# EAGLE board bitfury_adapter (EAGLE 6.4)
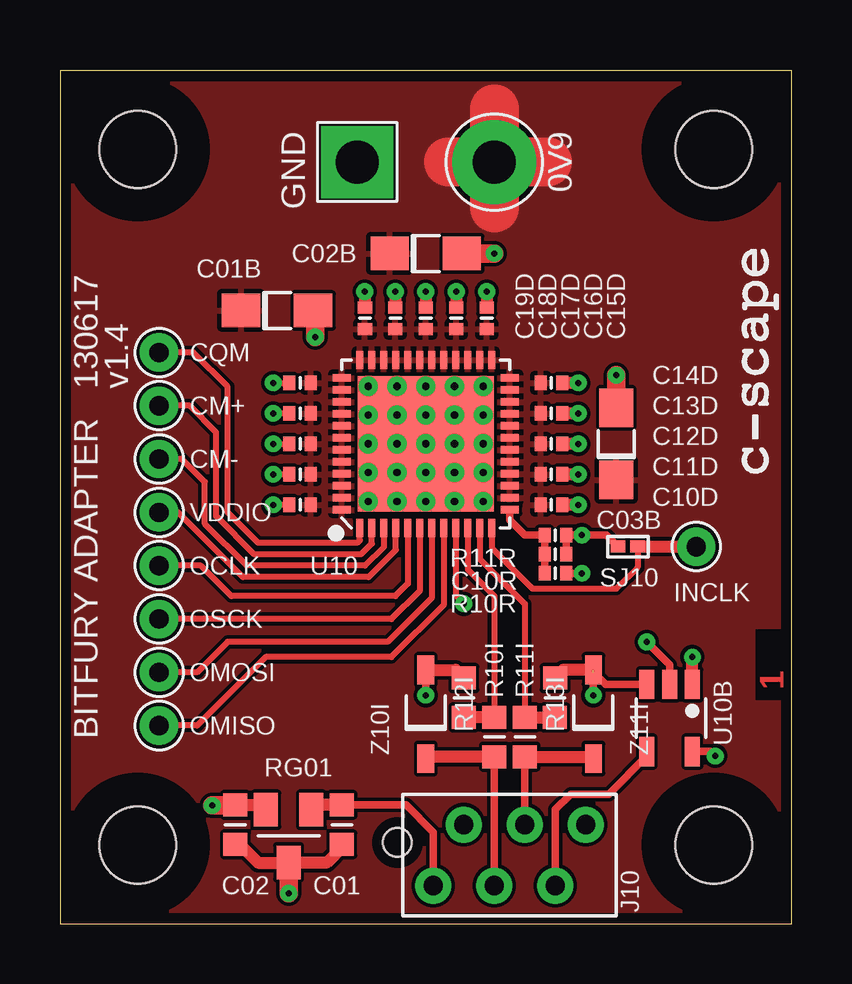
[diagram p0: board, top side]
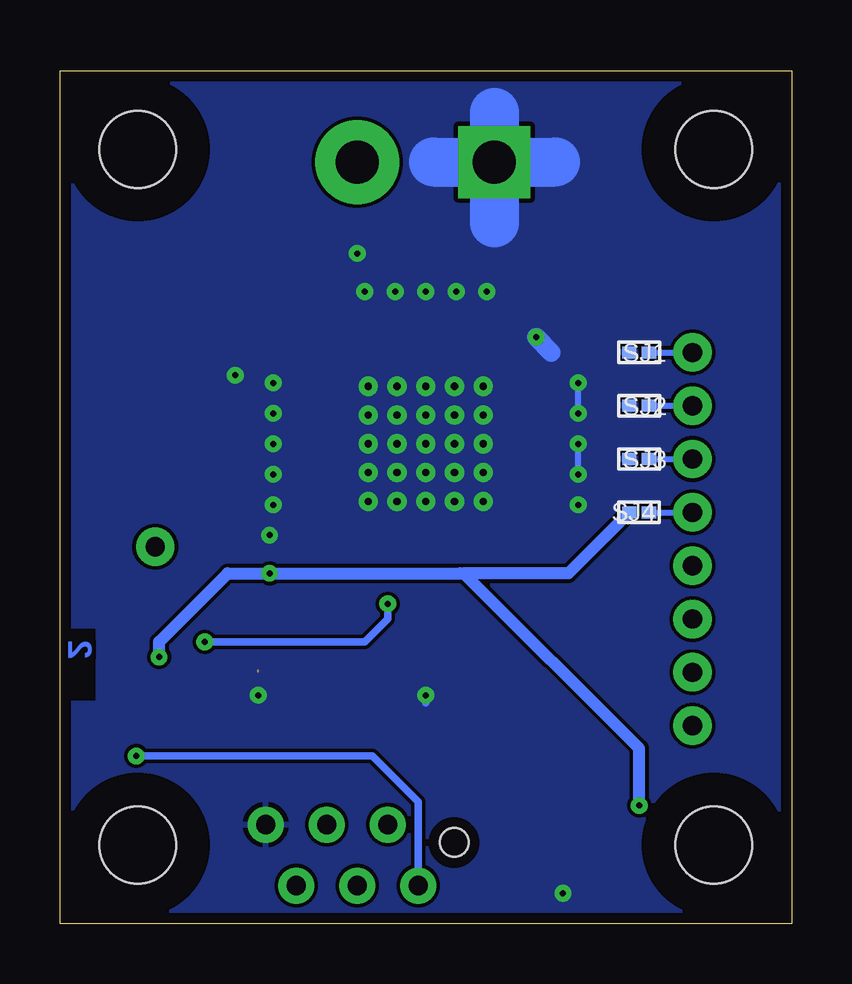
[diagram p1: board, bottom side, seen from below]

Size 30.48 x 35.56 mm. Coordinates in mm from the lower left corner, seen from the top.
Outline: 0,0 30.48,0 30.48,35.56 0,35.56 0,0
Copper layers (1*16): Top 0.018mm / dielectric 1.55mm / Bottom 0.018mm
Design rules "default *": minimum track width 0.15mm, minimum drill 0.25mm, track to track 0.15mm, track to pad 0.15mm, pad to pad 0.15mm, via to via 0.15mm, smd to smd 0mil, copper to edge 0.45mm, drill to drill 0.3mm, minimum pad ring 0.2mm, minimum via ring 0.2mm, stop-mask expansion 0.1mm, vias tented up to drill 0.4mm, thermal gap 0.2mm

## Footprints (pad centres in the part's own frame; a part is rotated, then mirrored left to right if it is on the bottom)
PAD_HOLE_BIG = drill 1.8 pad 3.5: 1 0,0
CAP0603 = smd 0.95 x 1: 1 -0.821,0.002; 2 0.822,0
CAP0402 = smd 0.5 x 0.6: 1 -0.45,0; 2 0.45,0
ECAP_SMA = smd 1.6 x 1.4: + -1.5,0; - 1.5,0
PAD_HOLE_0.8MM = drill 0.8 pad 1.6: 1 0,0
HOLE_NPTH_3.2MM = hole 3.2: 0,0
CON_MICROMATCH_TOP_6F = drill 0.8 pad 1.5: 1 -3.175,-1.27; 2 -1.905,1.27; 3 -0.635,-1.27; 4 0.635,1.27; 5 1.905,-1.27; 6 3.175,1.27 | hole 1.2: -4.675,0.53
RES0603 = smd 0.95 x 1: 1 -0.821,0.002; 2 0.822,0
RES0402 = smd 0.5 x 0.6: 1 -0.45,0; 2 0.45,0
SOT23 = smd 1 x 1.4: 1 -0.95,-1.1; 2 0.95,-1.1; 3 0,1.1
SJ2-S = smd 0.6 x 0.5: 1 -0.41,0; 2 0.41,0
QNF48 = smd 0.3 x 0.75: 1 -2.75,-3.5; 2 -2.25,-3.5; 3 -1.75,-3.5; 4 -1.25,-3.5; 5 -0.75,-3.5; 6 -0.25,-3.5; 7 0.25,-3.5; 8 0.75,-3.5; 9 1.25,-3.5; 10 1.75,-3.5; 11 2.25,-3.5; 12 2.75,-3.5; 25 2.75,3.5; 26 2.25,3.5; 27 1.75,3.5; 28 1.25,3.5; 29 0.75,3.5; 30 0.25,3.5; 31 -0.25,3.5; 32 -0.75,3.5; 33 -1.25,3.5; 34 -1.75,3.5; 35 -2.25,3.5; 36 -2.75,3.5 | smd 0.75 x 0.3: 13 3.5,-2.75; 14 3.5,-2.25; 15 3.5,-1.75; 16 3.5,-1.25; 17 3.5,-0.75; 18 3.5,-0.25; 19 3.5,0.25; 20 3.5,0.75; 21 3.5,1.25; 22 3.5,1.75; 23 3.5,2.25; 24 3.5,2.75; 37 -3.5,2.75; 38 -3.5,2.25; 39 -3.5,1.75; 40 -3.5,1.25; 41 -3.5,0.75; 42 -3.5,0.25; 43 -3.5,-0.25; 44 -3.5,-0.75; 45 -3.5,-1.25; 46 -3.5,-1.75; 47 -3.5,-2.25; 48 -3.5,-2.75 | smd 5.65 x 5.65: EP 0,0 | drill 0.3 pad 0.8: V1 -2.4,2.4; V2 -1.2,2.4; V3 0,2.4; V4 1.2,2.4; V5 2.4,2.4; V6 -2.4,1.2; V7 -1.2,1.2; V8 0,1.2; V9 1.2,1.2; V10 2.4,1.2; V11 -2.4,0; V12 -1.2,0; V13 0,0; V14 1.2,0; V15 2.4,0; V16 -2.4,-1.2; V17 -1.2,-1.2; V18 0,-1.2; V19 1.2,-1.2; V20 2.4,-1.2; V21 -2.4,-2.4; V22 -1.2,-2.4; V23 0,-2.4; V24 1.2,-2.4; V25 2.4,-2.4
SOT23-5 = smd 0.62 x 1.22: 1 -0.95,-1.4; 2 0,-1.4; 3 0.95,-1.4; 4 0.95,1.4; 5 -0.95,1.4
PAD_HOLE_SQR_1.8MM = drill 1.8 pad 3 square: 1 0,0
ZENER_SOD123 = smd 1.2 x 0.7: 1 -1.85,0; 2 1.85,0

## Placement (x,y rotation side)
0V9  PIN_TEST_BIG  [PAD_HOLE_BIG]  18.1,31.75 0 top
C01  1U  [CAP0603]  11.75,4.13 270 top
C1AD  100N  [CAP0402]  10,22.54 180 top
C01B  22U  [ECAP_SMA]  9.05,25.56 0 top
C1BD  100N  [CAP0402]  10,21.27 180 top
C1CD  100N  [CAP0402]  10,20 180 top
C1DD  100N  [CAP0402]  10,18.73 180 top
C1ED  100N  [CAP0402]  10,17.46 180 top
C02  10U  [CAP0603]  7.3,4.13 270 top
C02B  22U  [ECAP_SMA]  15.24,27.94 0 top
C03B  22U  [ECAP_SMA]  23.18,20 90 top
C10D  100N  [CAP0402]  20.48,17.46 0 top
C10R  100N  [CAP0402]  20.64,15.4 0 top
C11D  100N  [CAP0402]  20.48,18.73 0 top
C12D  100N  [CAP0402]  20.48,20 0 top
C13D  100N  [CAP0402]  20.48,21.27 0 top
C14D  100N  [CAP0402]  20.48,22.54 0 top
C15D  100N  [CAP0402]  17.78,25.24 90 top
C16D  100N  [CAP0402]  16.51,25.24 90 top
C17D  100N  [CAP0402]  15.24,25.24 90 top
C18D  100N  [CAP0402]  13.97,25.24 90 top
C19D  100N  [CAP0402]  12.7,25.24 90 top
CM+  PIN_TEST  [PAD_HOLE_0.8MM]  4.13,21.59 0 top
CM-  PIN_TEST  [PAD_HOLE_0.8MM]  4.13,19.37 0 top
CQM  PIN_TEST  [PAD_HOLE_0.8MM]  4.13,23.81 0 top
H1  HOLE_NPTH_3.2MM  [HOLE_NPTH_3.2MM]  3.24,32.28 0 top
H2  HOLE_NPTH_3.2MM  [HOLE_NPTH_3.2MM]  27.24,32.28 0 top
H3  HOLE_NPTH_3.2MM  [HOLE_NPTH_3.2MM]  27.24,3.28 0 top
H4  HOLE_NPTH_3.2MM  [HOLE_NPTH_3.2MM]  3.24,3.28 0 top
INCLK  PIN_TEST  [PAD_HOLE_0.8MM]  26.51,15.72 90 top
J10  [CON_MICROMATCH_TOP_6F]  18.73,2.86 0 top
OCLK  PIN_TEST  [PAD_HOLE_0.8MM]  4.13,14.92 0 top
OMISO  PIN_TEST  [PAD_HOLE_0.8MM]  4.13,8.26 0 top
OMOSI  PIN_TEST  [PAD_HOLE_0.8MM]  4.13,10.48 0 top
OSCK  PIN_TEST  [PAD_HOLE_0.8MM]  4.13,12.7 0 top
R10I  330R  [RES0603]  18.1,7.78 90 top
R10R  1K  [RES0402]  20.64,14.61 180 top
R11I  330R  [RES0603]  19.37,7.78 90 top
R11R  1K  [RES0402]  20.64,16.19 0 top
R12I  390R  [RES0603]  16.83,9.42 270 top
R13I  390R  [RES0603]  20.62,9.42 270 top
RG01  AP130-18SAG-7  [SOT23]  9.53,3.65 180 top
SJ1  SJ2SJ2-S  [SJ2-S]  6.35,23.81 0 bottom
SJ2  SJ2SJ2-S  [SJ2-S]  6.35,21.59 0 bottom
SJ3  SJ2SJ2-S  [SJ2-S]  6.35,19.37 0 bottom
SJ4  SJ2SJ2-S  [SJ2-S]  6.35,17.14 180 bottom
SJ10  SJ2SJ2-S  [SJ2-S]  23.65,15.72 0 top
U10  BITFURY  [QNF48]  15.24,20 0 top
U10B  FXLP34P5X  [SOT23-5]  25.4,8.57 180 top
U$47  [CSCAPE2]  29.53,18.73 90 top
U$83  [PAD_HOLE_SQR_1.8MM]  12.38,31.75 270 top
VDDIO  PIN_TEST  [PAD_HOLE_0.8MM]  4.13,17.14 0 top
Z10I  3V3  [ZENER_SOD123]  15.24,8.73 270 top
Z11I  3V3  [ZENER_SOD123]  22.23,8.73 270 top

## Library data of the parts
0V9 C01 C1AD C01B C1BD C1CD C1DD C1ED C02 C02B C03B C10D C10R C11D C12D C13D C14D C15D C16D C17D C18D C19D CM+ CM- CQM H1-H4 INCLK J10 OCLK OMISO OMOSI OSCK R10I R10R R11I R11R R12I R13I SJ1-SJ4 SJ10 U$83 VDDIO Z10I Z11I = 00-own_parts
RG01 U10 U10B = 00-bitfury
U$47 = 01-cs-logo

## Nets
GND: C01.2 C1AD.2 C01B.- C1BD.2 C1CD.2 C1DD.2 C1ED.2 C02.2 C02B.- C03B.- C10D.2 C10R.2 C11D.2 C12D.2 C13D.2 C14D.2 C15D.2 C16D.2 C17D.2 C18D.2 C19D.2 J10.6 R11R.2 R12I.1 R13I.1 RG01.3 SJ1.1 SJ2.1 SJ3.1 SJ10.1 U10.EP U10.V1 U10.V2 U10.V3 U10.V4 U10.V5 U10.V6 U10.V7 U10.V8 U10.V9 U10.V10 U10.V11 U10.V12 U10.V13 U10.V14 U10.V15 U10.V16 U10.V17 U10.V18 U10.V19 U10.V20 U10.V21 U10.V22 U10.V23 U10.V24 U10.V25 U10B.3 U$83.1 Z10I.1 Z11I.1
INCLK: INCLK.1 SJ10.2 U10.12
INMISO: U10.9 U10B.2
INMISOB: J10.5 U10B.4
INMOSI: R10I.2 R12I.2 U10.10
INSCK: R11I.2 R13I.2 U10.11
IOREF: C10R.1 R10R.2 R11R.1 U10.13
N$1: J10.3 R10I.1 Z10I.2
N$2: J10.4 R11I.1 Z11I.2
N$5: CM-.1 SJ3.2 U10.3
N$6: CM+.1 SJ2.2 U10.2
N$7: CQM.1 SJ1.2 U10.1
N$8: SJ4.1 U10.4 VDDIO.1
OUTCLK: OCLK.1 U10.5
OUTMISO: OMISO.1 U10.8
OUTMOSI: OMOSI.1 U10.7
OUTSCK: OSCK.1 U10.6
VDD_0V9: 0V9.1 C1AD.1 C01B.+ C1BD.1 C1CD.1 C1DD.1 C1ED.1 C02B.+ C03B.+ C10D.1 C11D.1 C12D.1 C13D.1 C14D.1 C15D.1 C16D.1 C17D.1 C18D.1 C19D.1 U10.14 U10.15 U10.16 U10.17 U10.18 U10.19 U10.20 U10.21 U10.22 U10.23 U10.24 U10.25 U10.26 U10.27 U10.28 U10.29 U10.30 U10.31 U10.32 U10.33 U10.34 U10.35 U10.36 U10.37 U10.38 U10.39 U10.40 U10.41 U10.42 U10.43 U10.44 U10.45 U10.46 U10.47 U10.48
VDD_1V8: C02.1 R10R.1 RG01.2 SJ4.2 U10B.1
VDD_3V3: C01.1 J10.1 RG01.1 U10B.5

## Tracks (layer width: path | path; a pad name or v marks a point on that pad's centre or on a via)
GND  (via drill 0.25 pad 0.7)  (1 unrouted)
  Top 0.203: 13.49,17.62 13.34,17.78
  Top 0.254: C1DD.2 v8.89,18.73 | v8.89,20 C1CD.2 | C1BD.2 v8.89,21.27 | v8.89,22.54 C1AD.2 | C1ED.2 v8.89,17.46 | U10.V21 13.02,17.78 13.34,17.78
  Top 0.305: SJ10.1 22.77,16.19 v21.75,16.19 R11R.2 C10R.2 | Z10I.1 v15.24,9.53 | U10B.3 22.73,9.97 22.23,10.48 v22.23,9.53
  Top 0.508: v12.7,26.35 C19D.2 | v13.97,26.35 C18D.2 | v15.24,26.35 C17D.2 | v16.51,26.35 C16D.2 | v17.78,26.35 C15D.2 | v21.59,22.54 C14D.2 | v21.59,21.27 C13D.2 | v21.59,20 C12D.2 | v21.59,18.73 C11D.2 | v21.59,17.46 C10D.2 | C01.2 11.75,3.17 11.11,2.54 RG01.3 9.51,2.54 8.26,2.54 7.49,3.31 C02.2 | Z10I.1 16.49,10.58 R12I.1 | Z11I.1 20.97,10.58 R13I.1
  Top 0.762: v9.53,1.27 RG01.3 | v23.18,22.86 C03B.- | v18.1,27.94 C02B.- | C01B.- 10.64,25.47 v10.64,24.45
  Bottom 0.254: v8.89,18.73 v8.89,20 | v8.89,21.27 v8.89,22.54
  Bottom 0.305: v15.24,9.53 15.24,9.21
  Bottom 0.762: v10.64,24.45 10,23.81
  Bottom 2.032: U$83.1 9.84,31.75 | 14.92,31.75 U$83.1 | 12.38,33.81 U$83.1 | U$83.1 12.38,29.21
  pour Bottom: 0,0 30.48,0 30.48,9.21 28.89,9.21 28.89,12.38 30.48,12.38 30.48,35.56 0,35.56
INCLK
  Top 0.254: U10.12 17.99,15.66 19.68,13.97 23.18,13.97 24.06,14.86 SJ10.2
  Top 0.508: SJ10.2 INCLK.1
INMISO  (via drill 0.25 pad 0.7)
  Top 0.254: U10.9 16.49,13.67 v16.83,13.34
  Top 0.305: U10B.2 25.4,10.79 v24.45,11.75
  Bottom 0.305: v16.83,13.34 16.83,12.7 17.78,11.75 v24.45,11.75
INMISOB
  Top 0.305: U10B.4 24.45,6.99 22.86,5.4 21.27,5.4 20.64,4.76 J10.5
INMOSI
  Top 0.254: U10.10 16.99,14.76 18.1,13.65 R10I.2
  Top 0.508: R10I.2 R12I.2
INSCK
  Top 0.254: U10.11 17.49,15.21 19.37,13.34 R11I.2
  Top 0.508: R11I.2 R13I.2
IOREF
  Top 0.305: U10.13 18.74,16.84 18.73,16.83 19.37,16.19 R11R.1 R10R.2 C10R.1
N$1
  Top 0.305: R10I.1 J10.3
  Top 0.508: R10I.1 15.32,6.96 Z10I.2
N$2
  Top 0.305: R11I.1 J10.4
  Top 0.508: R11I.1 22.15,6.96 Z11I.2
N$5
  Top 0.254: U10.3 13.49,15.71 12.7,14.92 7.78,14.92 6.03,16.67 6.03,18.41 5.08,19.37 CM-.1
  Bottom 0.254: SJ3.2 CM-.1
N$6
  Top 0.254: CM+.1 5.4,21.59 6.51,20.48 6.51,16.99 8.1,15.4 12.54,15.4 12.99,15.85 U10.2
  Bottom 0.254: SJ2.2 CM+.1
N$7
  Top 0.254: CQM.1 5.56,23.81 6.99,22.38 6.99,17.14 8.26,15.88 12.38,15.88 12.49,15.98 U10.1
  Bottom 0.254: SJ1.2 CQM.1
N$8
  Top 0.254: VDDIO.1 4.92,17.14 7.62,14.45 12.86,14.45 13.99,15.58 U10.4
  Bottom 0.254: SJ4.1 VDDIO.1
OUTCLK
  Top 0.254: U10.5 14.49,14.17 13.97,13.65 7.14,13.65 5.87,14.92 OCLK.1
OUTMISO
  Top 0.254: U10.8 15.99,13.29 13.81,11.11 8.57,11.11 5.71,8.26 OMISO.1
OUTMOSI
  Top 0.254: U10.7 15.49,13.59 13.65,11.75 6.99,11.75 5.71,10.48 OMOSI.1
OUTSCK
  Top 0.254: U10.6 14.99,13.88 13.81,12.7 OSCK.1
VDD_0V9
  Top 2.032: 20.32,31.75 16.19,31.75 | 18.1,33.97 18.1,29.84
  pour Top: 0,0 30.48,0 30.48,9.21 28.89,9.21 28.89,12.38 30.48,12.38 30.48,35.56 0,35.56
VDD_1V8  (via drill 0.25 pad 0.7)
  Top 0.254: 7.28,4.92 C02.1
  Top 0.305: v21.75,14.61 R10R.1 | v26.35,11.11
  Top 0.508: C02.1 8.38,4.95 RG01.2 | U10B.1 v26.35,11.11
  Top 0.762: v6.35,4.92 7.28,4.92
  Bottom 0.508: 13.65,14.61 13.81,14.61 v21.75,14.61 23.5,14.61 26.35,11.75 v26.35,11.11 | v6.35,4.92 6.35,7.3 13.65,14.61 | SJ4.2 9.3,14.61 13.65,14.61
VDD_3V3  (via drill 0.25 pad 0.7)
  Top 0.305: RG01.1 | J10.1 15.56,3.81 14.42,4.95 C01.1 | U10B.5 27.12,7.17 v27.3,6.99
  Top 0.508: C01.1 10.67,4.95 RG01.1
  Bottom 0.305: v27.3,6.99 17.46,6.99 15.56,5.08 J10.1

## Text on the board
Top: 1
Bottom: 2
tPlace: 130617 | v1.4 | BITFURY ADAPTER